# Altium PCB IRF7317+TR.PcbDoc
Units mil, origin at the board's own origin, x right, y up, seen from the top; angles counter-clockwise.
Board outline 2850 x 1640 mil, 2 copper layers (Top Layer, Bottom Layer); 41 components, 22 nets, 105 pads, 34 vias.
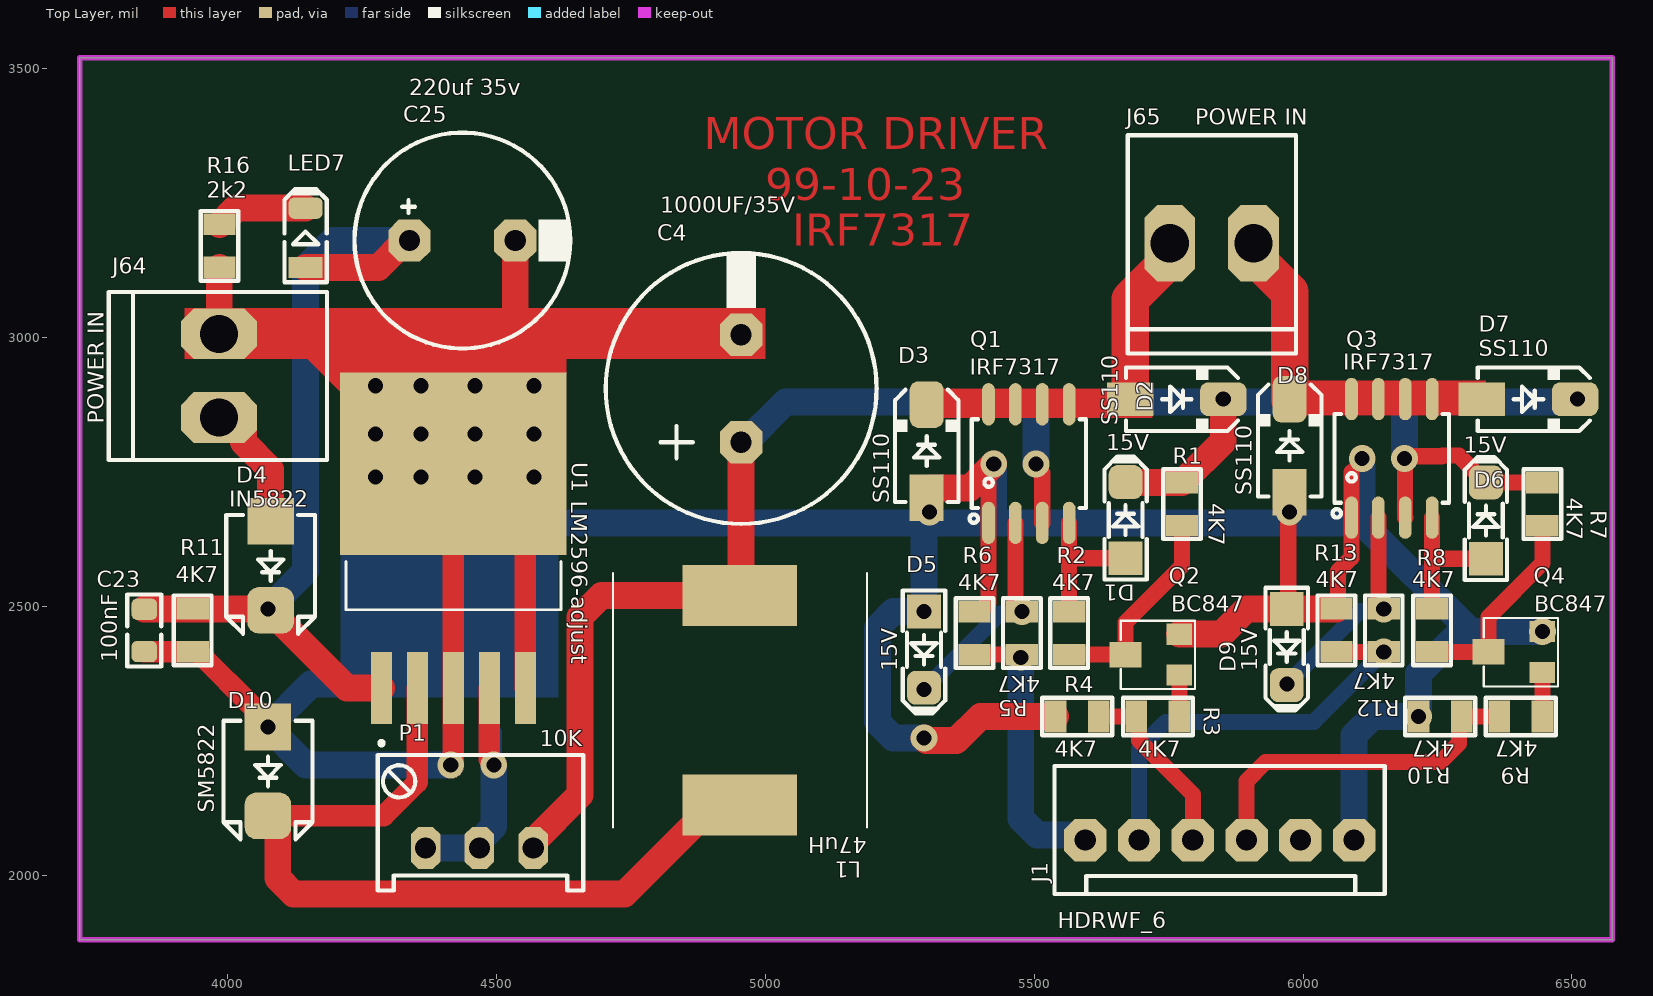
[diagram p0: Top Layer view]
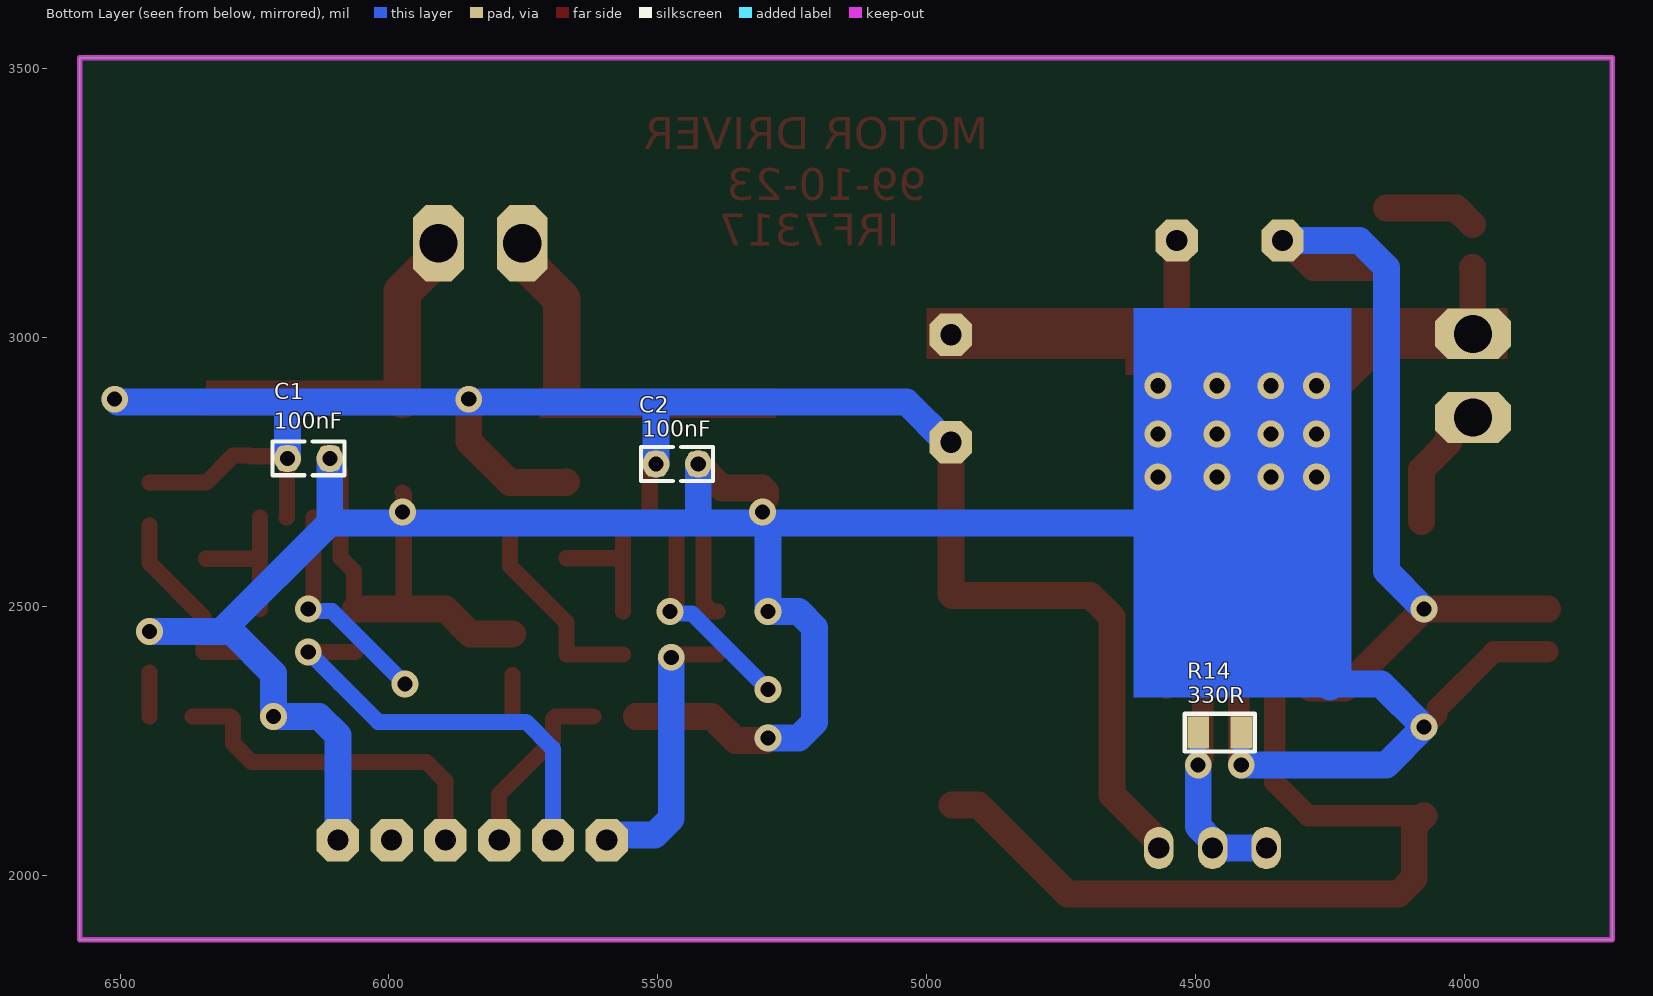
[diagram p1: Bottom Layer view, seen from below]
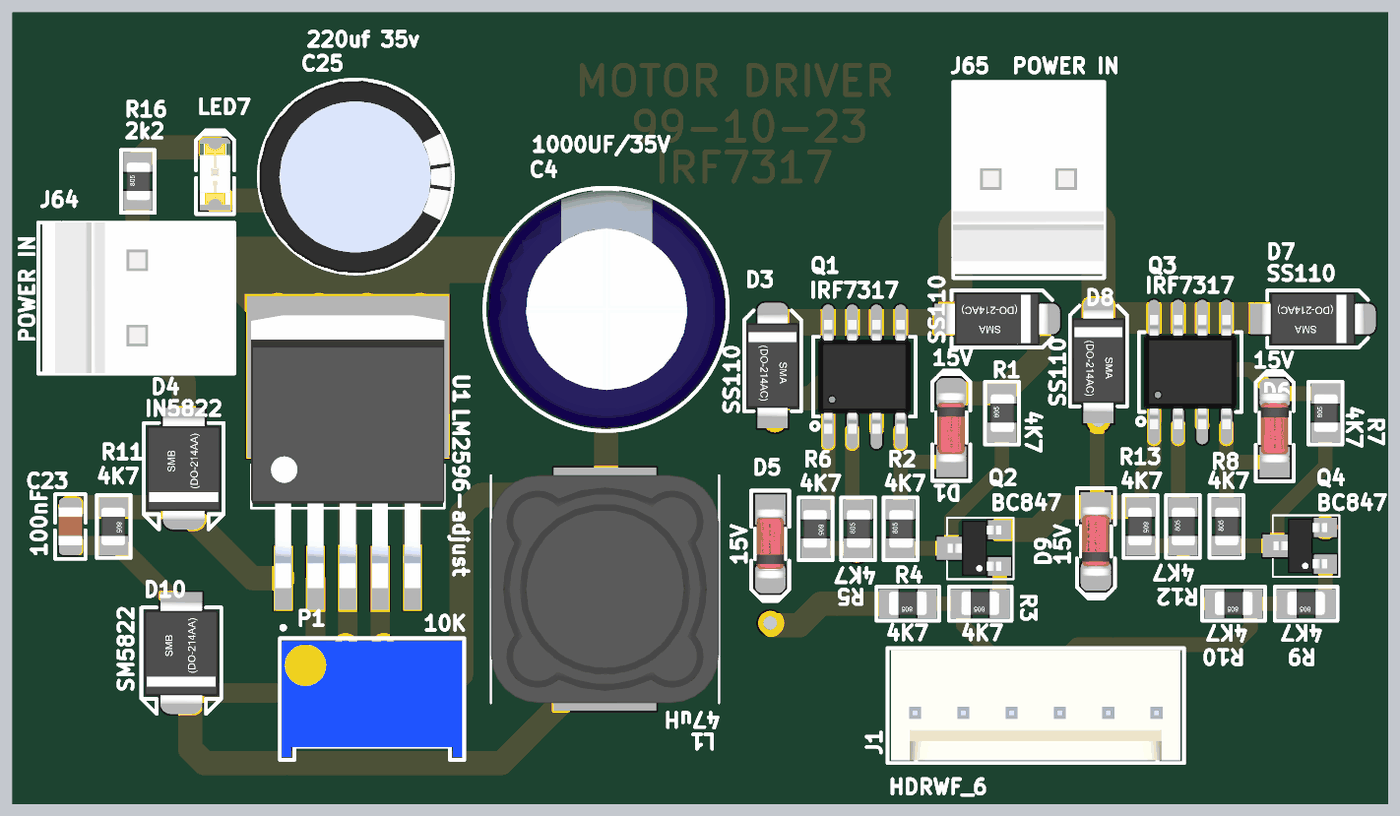
[diagram p2: 3D render of the assembled board from above, using the file's embedded part models]
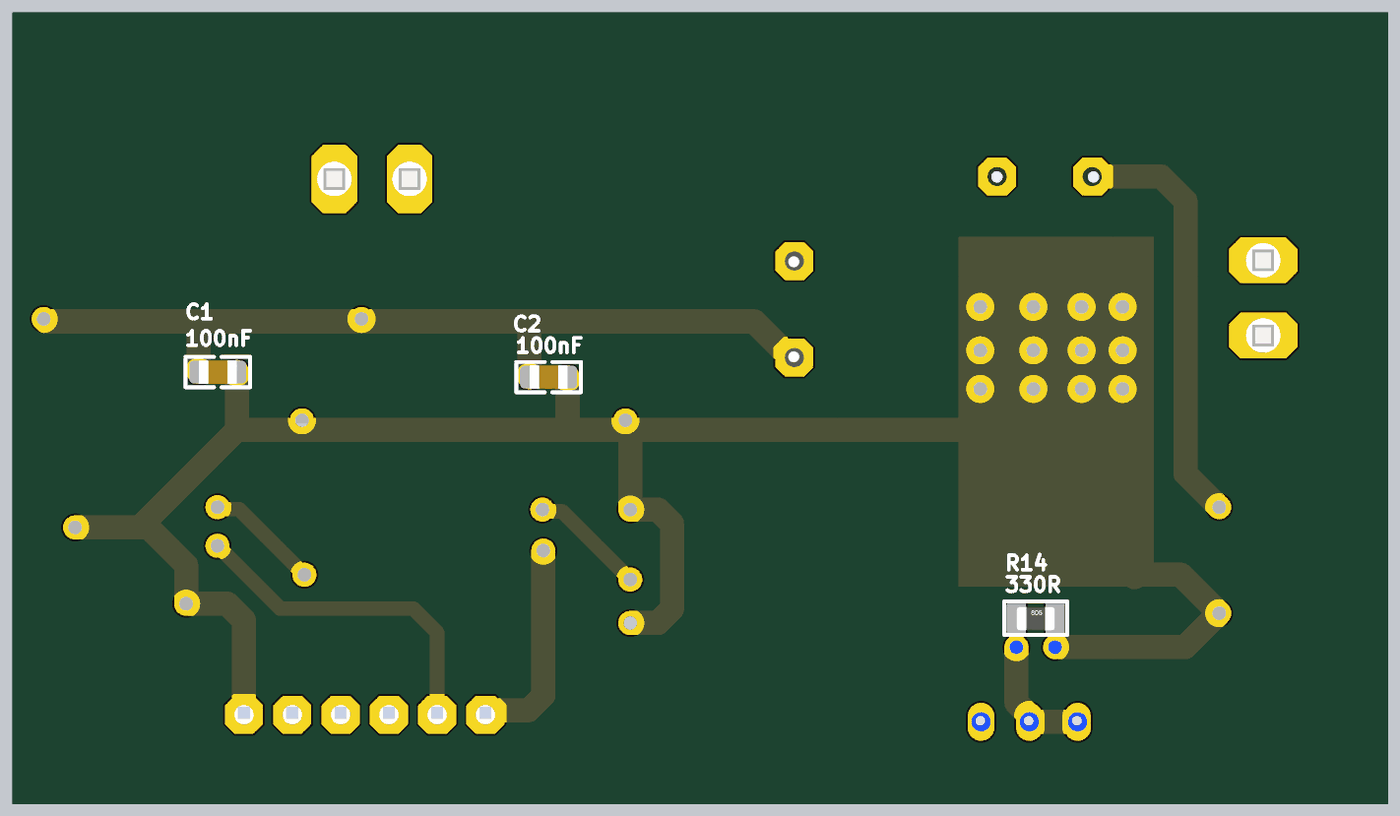
[diagram p3: 3D render of the assembled board from below, using the file's embedded part models]

## Layer stack, top to bottom
Top Solder: solder mask 0.4, Solder Resist, Dk 3.5
Top Layer: signal copper 1.4
Dielectric 1: dielectric 12.6, FR-4, Dk 4.8
Bottom Layer: signal copper 1.4
Bottom Solder: solder mask 0.4, Solder Resist, Dk 3.5

## Board outline
3725,1880 3725,3520 6575,3520 6575,1880

## Design rules (kind name [scope] priority, off if disabled: settings)
Clearance [All] p1: gap=10 ignorepadtopadclearanceinfootprint=FALSE except(0: Arc-Hole Track-Hole SMDPad-Hole THPad-Hole Via-Hole Fill-Hole Poly-Hole Region-Hole Text-Hole)
PolygonConnect [All] p1: connectstyle=Relief reliefconductorwidth=10 reliefentries=4 polygonreliefangle="90 Angle" airgapwidth=10
RoutingVias [All] p1: holewidth=28 width=50 viastyle="Through Hole" minholewidth=28 minwidth=50 maxholewidth=28 maxwidth=50
SolderMaskExpansion [All] p1: expansion=4 istentingtop=FALSE
Width [All] p1: maxlimit=70 minlimit=20 preferedwidth=30 minimp=50.000000 maximp=50.000000 favimp=50.000000
30 further rules are at their usual default settings.

## Components (designator, comment, footprint, x,y, rotation, side; value= is the part's Value field where it differs from the comment)
C1 "100nF" C0805 6149.37,2775 r0 bottom
C2 "100nF" C0805 5464.18,2764.44 r0 bottom
C4 "1000UF/35V" C_EL_12X25 4955,2905 r90 top
C23 "100nF" C0805 3845,2455 r90 top
C25 "220uf 35v" C_EL_10X12 4436.57,3180 r0 top
D1 "15V" D_SOD80 5670,2660 r90 top
D2 "SS110" D_SMA 5765,2885 r0 top value=?
D3 "SS110" D_SMA 5300,2788.39 r90 top value=?
D4 "IN5822" D_SMB 4080,2575 r270 top
D5 "15V" D_SOD80 5295,2419.13 r270 top
D6 "15V" D_SOD80 6340,2659.15 r90 top
D7 "SS110" D_SMA 6419.17,2885 r0 top value=?
D8 "SS110" D_SMA 5975,2798.39 r90 top value=?
D9 "15V" D_SOD80 5969.67,2424.13 r270 top
D10 "SM5822" D_SMB 4075,2192.68 r270 top value=?
J1 "HDRWF_6" WF_6 5845,2065 r0 top
J64 "POWER IN" PWL_2 3983.81,2928.65 r90 top
J65 "POWER IN" PWL_2 5830,3175 r180 top
L1 "47uH" CDRH127LDNP560MC-12*12 4952.69,2130.26 r0 top
LED7 "" LED1206RED 4145,3185.12 r90 top
P1 "10K" POT_3296W 4468.27,2050.27 r0 top
Q1 "IRF7317" SO_8 5490,2765.24 r90 top
Q2 "BC847" SOT23 5770,2372 r90 top
Q3 "IRF7317" SO_8 6165,2775 r90 top
Q4 "BC847" SOT23 6445,2377 r90 top
R1 "4K7" R0805 5775,2690 r0 top
R2 "4K7" R0805 5565,2450 r0 top
R3 "4K7" R0805 5730,2295 r90 top
R4 "4K7" R0805 5580,2295 r90 top
R5 "4K7" R0805 5476.99,2450 r0 top
R6 "4K7" R0805 5388.98,2450 r180 top
R7 "4K7" R0805 6445,2690 r0 top
R8 "4K7" R0805 6240,2455 r0 top
R9 "4K7" R0805 6405,2295 r90 top
R10 "4K7" R0805 6255,2295 r90 top
R11 "4K7" R0805 3935,2455 r180 top
R12 "4K7" R0805 6150,2455 r0 top
R13 "4K7" R0805 6061.99,2455 r180 top
R14 "330R" R0805 4455,2265 r270 bottom
R16 "2k2" R0805 3985,3170 r0 top
U1 "LM2596-adjust" "to-263-5 5d2pak LM2596S" 4420,2765 r90 top

## Footprints (in the part's own frame and the unit in brackets; to place one, negate y for a bottom-side part, rotate by r counter-clockwise, add the part's x,y. Pads: shape width x height; smd on the part's side, far side on the other; paste and mask are expansions set on the pad)
C0805 [mm] "CHIP Capacitor, 2.0X1.3mm, 0805"
  rrect50% 1x1.2 smd mask+0.075: 1(-1,0) 2(1,0)
  Top Layer pour cut-out: -0.5,0.8 0.5,0.8 0.5,-0.8 -0.5,-0.8
  silkscreen extent -1.7,-0.8 1.7,0.8, body extent -1,-0.62 1,0.62, height 1
C_EL_10X12 [mm] "Cap Elec, D10.0X12.0H pitch: 5.0mm"
  oct 2x2 hole 1: 1(-2.5,0) 2(2.5,0)
  silkscreen extent -5.1,-5.1 5.1,5.1, body extent -5.07,-5.08 5.05,5.04, height 13.7
C_EL_12X25 [mm] "Cap Elec, D12.0X25.0H pitch: 5.0mm, RB.2/.5"
  oct 2x2 hole 1: 1(-2.54,0) 2(2.54,0)
  silkscreen extent -6.4,-6.4 6.4,6.4, body extent -6.25,-6.27 6.25,6.21, height 25.8
CDRH127LDNP560MC-12*12 [mm]
  rect 5.4x2.9 smd: 1(0,0) 2(0,9.9)
  silkscreen extent -6,-1.05 6,10.95, body extent -6,-1.05 6,10.95, height 7.8
D_SMA [mm] "SMA Molded Diode, 2-Leads, Body 4.3x2.7mm, SOD-128"
  rect 2.2x1.6 smd: 1(-2.2,0)
  rrect50% 2.2x1.6 smd: 2(2.2,0)
  silkscreen extent -2.4,-1.5 2.9,1.5, body extent -2.75,-1.4 2.75,1.4, height 2.6
D_SMB [mm] "SMB Molded Diode, 2-Leads, Body 4.3x3.5mm"
  rect 2.2x2.2 smd: 1(-2.1,0)
  rrect50% 2.2x2.2 smd: 2(2.1,0)
  Top Layer pour cut-out: -1.524,2.1 -1.524,-2.1 1.524,-2.1 1.524,2.1
  silkscreen extent -2.4,-2.1 3.2,2.1, body extent -2.75,-1.95 2.75,1.95, height 2.45
D_SOD80 [mm] "SOD-80 MINI-MELF 3.6X1.6mm, LL-34, LL4148"
  rect 1.6x1.6 smd: 1(-1.8,0)
  rrect50% 1.6x1.6 smd: 2(1.8,0)
  Top Layer pour cut-out: -1.016,1.016 1.016,1.016 1.016,-1.016 -1.016,-1.016
  silkscreen extent -2.8,-1 3,1, body extent -1.85,-0.8 1.85,0.8, height 2
LED1206RED [mm] "LED, 1206, RED"
  rect 1x1.6 smd mask+0.075: 1(-1.4,0)
  rrect50% 1x1.6 smd mask+0.075: 2(1.4,0)
  Top Layer pour cut-out: -1.1,1.1 -1.1,-1.1 1.1,-1.1 1.1,1.1
  silkscreen extent -2.1,-1 2.3,1, body extent -1.6,-0.8 1.6,0.8, height 0.68
POT_3296W [mm] "POT, TRIM, 10.0X5.0mm, pitch: 2.5mm 3299W 3296W S64W"
  oct 1.4x2 / inner round 1.2 / far side oval 1.4x2 hole 1: 1(-2.54,0) 2(0,0) 3(2.54,0)
  silkscreen extent -4.8,-2 4.9,4.4, body extent -4.73,-1.85 4.8,4.25, height 11.56
PWL_2 [mm] "Connector; Header; 2 Position"
  oct 2.4x3.6 hole 1.8: 1(-1.98,0) 2(1.98,0)
  silkscreen extent -3.98,-5.1 3.96,5.21, body extent -3.96,-5 3.96,5, height 13.5
R0805 [mil]
  rect 60x40 smd: 1(0,40) 2(0,-40)
  silkscreen extent -35,-65 35,65, body extent -24,-39 26,39, height 31
SO_8 [mm] "SOP-8, 5x3.9mm body 1.27mm pitch, SOT96-1, M08A, S8, SOIC8, VO8, MS-012AA(JEDEC), R-8, 8S2, VOG8"
  oval 2x0.6 smd: 1(-2.8,1.905) 2(-2.8,0.635) 3(-2.8,-0.635) 4(-2.8,-1.905) 5(2.8,-1.905) 6(2.8,-0.635) 7(2.8,0.635) 8(2.8,1.905)
  silkscreen extent -2.8,-2.7 2.1,2.8, body extent -3,-2.45 3,2.45, height 1.7
SOT23 [mm]
  rect 1x1.2 smd: 1(0,0) 2(1.93,0)
  rect 1.2x1.5 smd: 3(0.965,2.54)
  silkscreen extent -0.66,-0.74 2.57,2.77, body extent -0.48,-0.08 2.42,2.72
"to-263-5 5d2pak LM2596S" [mm]
  rect 3.4x1 smd paste-3 mask+0: 1(-10.6,3.4) 2(-10.6,1.7) 3(-10.6,0) 4(-10.6,-1.7) 5(-10.6,-3.4)
  rect 8.6x10.7 smd paste-6 mask+0: 6(0,0)
  silkscreen extent -13.3,-5.08 -4.62,5.08, body extent -11.11,-5.08 3.24,5.08, height 4.65
WF_6 [mm] "DS1070  WF, Cvilux CI31 pitch 2.54mm"
  oct 2x2 hole 1: 1(-6.35,0) 2(-3.81,0) 3(-1.27,0) 4(1.27,0) 5(3.81,0) 6(6.35,0)
  silkscreen extent -7.8,-2.55 7.8,3.5, body extent -7.62,-2.4 7.62,3.4, height 11.56

## Part data
C1 C2 C23: library part C
C4: library part CAP_ELECTRO_POLIMER
C25: library part CAP3528
D1 D5 D6 D9: library part ZENER, "DIODE, ZENER, 3W, 5.6V", ASSEMBLY=ASSEMBLY, DESC=DESCRIPTION, MANF=MCC, MANF_P#=3SMAJ5919B-TP, PARAM=5.6V, PARAM2="0.5W, 2Ohm, 67mA, -55~150oC", Price=0.5$
D2 D3 D7 D8 D10: library part SCHOTTKY, "DIODE, SCHOTTKY, 40V, 1A", ASSEMBLY=ASSEMBLY, DESC=DESCRIPTION, MANF=DIODES, MANF_P#=1N5819HW-7-F, PARAM=40V, PARAM2=1A, Price=PRICE
D4: library part "Diode 1N4005", "1 Amp General Purpose Rectifier", Code_JEDEC=DO-204-AL, ComponentLink1Description="Manufacturer Link", ComponentLink1URL=http://www.fairchildsemi.com/, ComponentLink2Description=Datasheet, ComponentLink2URL=http://www.fairchildsemi.com/ds/1N%2F1N4001.pdf, DatasheetVersion=1998, LatestRevisionDate=17-Jul-2002, LatestRevisionNote="Re-released for DXP Platform.", PackageDescription="Diode, Axial; Body 5.2 x 2.7 mm (LxDia. max), Lead Dia. 0.86 mm (max)", PackageReference=DO-41, PackageVersion=Aug-1999, Published=8-Jun-2000, Publisher="Altium Limited"
J1: "Header, WF, Pitch: 2.54mm"
J64 J65: library part "sip 2", "WR-PHD Pin Header, THT, pitch 2.54mm, Single Row, Vertical, 2pin", Contact Resistance=20mOhm, Operating Temperature="-40 to +105degC", Part Number=61300211121, Rated Current=3A, Withstanding Voltage=500VAC, Working Voltage=250VAC, ComponentLink1Description=Manufacturer, ComponentLink1URL=http://www.we-online.de, ComponentLink2Description=Datasheet, ComponentLink2URL=https://katalog.we-online.de/em/datasheet/6130xx11121.pdf, Gender=Male, Mounting Technology=THT, Orientation=Vertical, Packaging=Bag, Pin Number=2, Pitch=2.54mm, Published Date="June 2019", Publisher="Wurth Elektronik", Row Number=Single
L1: library part CDRH127_LDNP-560MC, "Inductor", Arrow Part Number=CDRH127/LDNP-560MC, Manufacturer_Name=Sumida, Mouser Part Number=851-CDRH127LDNP560MC, Arrow Price/Stock=https://www.arrow.com/en/products/cdrh127ldnp-560mc/sumida, Datasheet Link=https://www.arrow.com/en/products/cdrh127ldnp-560mc/sumida, Height=8mm, Manufacturer_Part_Number=CDRH127/LDNP-560MC, Mouser Price/Stock=https://www.mouser.co.uk/ProductDetail/Sumida/CDRH127-LDNP-560MC?qs=IXCoV6m%252B579ap3iATSRauQ%3D%3D
LED7: library part LED3mm
P1: library part Multi-Turn, "Potentiometer"
Q1 Q3: library part IRF7317PBF, "Transistor", Manufacturer_Name=Infineon, Mouser Part Number=942-IRF7317PBF, Arrow Part Number=IRF7317PBF, Arrow Price/Stock=https://www.arrow.com/en/products/irf7317pbf/infineon-technologies-ag, Datasheet Link=http://www.infineon.com/dgdl/irf7317pbf.pdf?fileId=5546d462533600a4015355f5b8de1b3d, Height=1.75mm, Manufacturer_Part_Number=IRF7317PBF, Mouser Price/Stock=https://www.mouser.com/Search/Refine.aspx?Keyword=942-IRF7317PBF
Q2 Q4: library part BC847AMTF, "Transistor BJT NPN", Manufacturer_Name="ON Semiconductor", Mouser Part Number=512-BC847AMTF, Arrow Part Number=BC847AMTF, Arrow Price/Stock=https://www.arrow.com/en/products/bc847amtf/on-semiconductor, Datasheet Link=http://www.onsemi.com/pub/Collateral/BC846-D.PDF, Height=1.2mm, Manufacturer_Part_Number=BC847AMTF, Mouser Price/Stock=https://www.mouser.com/Search/Refine.aspx?Keyword=512-BC847AMTF
R1 R2 R3 R4 R5 R6 R7 R8 R9 R10 R11 R12 R13 R16: library part R
R14: library part Res1, "Resistor", LatestRevisionDate=17-Jul-2002, LatestRevisionNote="Re-released for DXP Platform.", PackageDescription="Axial Device, Thru-Hole; 2 Leads; 0.3 in Pin Spacing", PackageReference=AXIAL-0.3, Published=8-Jun-2000, Publisher="Altium Limited"
U1: library part LM2596s

## Via types
v1: diameter 50, hole 28, Top Layer to Bottom Layer, 34 vias

## Nets (pads, with @x,y where several pads share a name; then routed paths per layer and width w, separated by ;. In a path a pad name is that pad's centre, name@x,y a point inside that pad or via, vN(x,y) a via of type N, cw(c..) or ccw(c..) an arc to the next point about the centre after c; other vN are vias at no path point)
24V: C23.2 C25.1 D4.2 LED7.1 R11.2 U1.1 | length 1593.9
  Top Layer w50: C23.2@3845,2495 R11.2 v1(4075,2495) 4222.32,2347.68 U1.1 ; LED7.1 4280.37,3130 4330.37,3180 C25.1
  Bottom Layer w50: v1(4075,2495) 4145,2565 4145,3130 4195,3180 C25.1
+19R: D4.1 J64.1 | length 246.7
  Top Layer w50: J64.1 4007.43,2850.7 4029.68,2828.45 4029.68,2804.83 4080,2754.51 D4.1
GND: C1.1 C2.1 C4.2 C23.1 C25.2 D3.1 D5.1 D8.1 D9.1 D10.1 J1.6 J64.2 Q1.1 Q2.2 Q3.1 Q4.2 R4.1 R6.2 R10.1 R11.1 R13.2 R14.1 R16.2 U1.3 U1.5 U1.6 | length 7948.9
  Top Layer w30: v1(4415,2205) v1@4417.5,2207.5 ; R6.2 5398.98,2490 5415,2506.02 Q1.1 5415,2749.22 5424.81,2759.03 v1(5424.81,2764.44) ; D9.1 5972.34,2497.66 5972.34,2709.11 D8.1 ; R13.2 6065,2498.01 6065,2565 6090,2590 Q3.1 6090,2749.59
  Top Layer w40: C23.1 3924.37,2415.63 3925,2415 R11.1 3945,2415 4051.69,2308.31 4051.69,2298.66 v1(4075,2275.35) ; v1(4415,2205) 4415,2207.71 4420,2212.71 U1.3 U1.6 4553.86,2631.14 U1.5
  Top Layer w50: J64.2 4137.06,3006.6 4378.66,2765 U1.6 4535,2880 C25.2 ; J64.2@3983.81,3026.6 J64.2@3984.4,3027.2 ; J64.2@3984.4,3007.2 3984.4,3129.4 R16.2 ; v1(5295,2255) 5300,2250 5355,2250 5400,2295 R4.1 ; D3.1 5300,2713.58 5306.5,2720.08 5380.45,2720.08 v1(5424.81,2764.44) ; Q2.2 5848,2448 5895,2495 D9.1 R13.2
  Bottom Layer w30: v1(4415,2205) R14.1
  Bottom Layer w50: 4250,2350 4245,2355 4154.65,2355 v1(4075,2275.35) 4145.35,2205 v1(4415,2205) ; 4500,2665 4510,2655 v1@5295,2655 ; v1(5295,2255) 5237.9,2255 5208.61,2284.29 5208.61,2460.71 5237.9,2490 v1(5295,2490) v1@5295,2655 ; v1(5424.81,2764.44) 5424.81,2655.19 5425,2655 ; J1.6 6095,2260 6130,2295 v1(6215,2295) 6215,2375 6293,2453 6312,2453 ; v1(6110,2775) 6110,2655 ; v1(6445,2453) 6312,2453 ; v1@5295,2655 5425,2655 ; 5425,2655 6110,2655 ; 6110,2655 6312,2453
  other v1: 5305,2675 5975,2675 4275,2740 4360,2740 4460,2740 4570,2740 4275,2820 4360,2820 4460,2820 4570,2820 4275,2910 4360,2910 4460,2910 4570,2910
Motor-A: D7.1 D8.2 J65.1 Q3.5 Q3.6 Q3.7 Q3.8 | length 317.8
  Top Layer w70: J65.1 5907.95,3151.38 5975,3084.33 D8.2
Motor-B: D2.1 D3.2 J65.2 Q1.5 Q1.6 Q1.7 Q1.8 | length 325.3
  Top Layer w70: D2.1@5683.19,2885 D2.1 5678.39,3071.09 5752.05,3144.75 J65.2
Motor-Direct1: J1.1 R5.2 R6.1 | length 522.6
  Top Layer w30: R6.1 R5.2@5475,2410
  Bottom Layer w50: v1(5475,2405) 5475,2105 5505.67,2074.33 5585.67,2074.33 J1.1
Motor-Direct2: J1.2 R12.2 R13.1 | length 787.6
  Top Layer w30: R13.1 v1(6150,2415)
  Bottom Layer w30: J1.2 5695,2235 5745,2285 6020,2285 6090.59,2355.59 v1(6150,2415)
NetD1_1: D1.1 Q1.4 R2.1 | length 274.5
  Top Layer w30: R2.1 5565,2600 ; Q1.4 5565,2600 ; D1.1 5575.87,2589.13 5565,2600
NetD5_2: D5.2 Q1.2 R5.1 | length 419.4
  Top Layer w30: v1(5295,2345) D5.2 ; Q1.2 5465,2495 5470,2490 v1(5476.99,2490)
  Bottom Layer w30: v1(5295,2345) 5436.17,2486.17 5473.16,2486.17 v1(5476.99,2490)
NetD6_1: D6.1 Q3.4 R8.1 | length 272.5
  Top Layer w30: R8.1 6240,2595 ; Q3.4 6240,2595 ; D6.1 6246.71,2588.29 6240,2595
NetD9_2: D9.2 Q3.2 R12.1 | length 412.3
  Top Layer w30: D9.2 5969.67,2354.67 v1(5970,2355) ; Q3.2 6140,2519.14 ccw(c6174.14,2519.14) v1(6150,2495)
  Bottom Layer w30: v1(5970,2355) 6106.17,2491.17 6146.17,2491.17 v1(6150,2495)
NetD10_2: D10.2 L1.1 U1.2 | length 1542.1
  Top Layer w40: D10.2 4093.31,2110 4290,2110 4353.07,2173.07 U1.2
  Top Layer w50: D10.2 4093.31,2091.69 4093.31,1994.29 4122.6,1965 4738.22,1965 4903.47,2130.26 L1.1
NetLED7_2: LED7.2 R16.1 | length 172.5
  Top Layer w50: R16.1 4015.24,3240.24 LED7.2
NetP1_1: P1.1 P1.2 R14.2 U1.4 | length 471.8
  Top Layer w40: U1.4 4486.93,2215.78 4495,2207.71 v1(4495,2205)
  Bottom Layer w30: v1(4495,2205) R14.2
  Bottom Layer w50: P1.1 P1.2 4468.27,2063.46 4495,2090.19 v1(4495,2205)
NetQ2_1: Q2.1 R3.2 | length 77
  Top Layer w30: R3.2 Q2.1
NetQ2_3: Q2.3 R1.2 R2.2 | length 388.5
  Top Layer w30: R2.2 Q2.3 5670,2470 5775,2575 R1.2
NetQ4_1: Q4.1 R9.2 | length 82
  Top Layer w30: R9.2 Q4.1
NetQ4_3: Q4.3 R7.2 R8.2 | length 381.4
  Top Layer w30: R8.2 Q4.3 6345,2480 6445,2580 R7.2
PWMA: J1.4 R9.1 R10.2 | length 656.1
  Top Layer w30: J1.4 5895,2175 5930,2210 6255,2210 6290,2245 6290,2290 R10.2 R9.1
PWMB: J1.3 R3.1 R4.2 | length 343.5
  Top Layer w30: R4.2 R3.1 5695,2290 5695,2250 5795,2150 J1.3
Vadj: C1.2 C2.2 C4.1 D1.2 D2.2 D6.2 D7.2 L1.2 P1.3 Q1.3 Q3.3 R1.1 R7.1 | length 3674.9
  Top Layer w30: v1(5503.55,2764.44) 5503.55,2759.03 5515,2747.58 Q1.3 ; Q3.3 6189.37,2665.39 6189.37,2774.37 v1(6188.74,2775) 6192.57,2778.83 6257.98,2778.83 6259.15,2780 6290.02,2780 D6.2 R7.1
  Top Layer w50: P1.3 4568.27,2062.08 4655,2148.81 4655,2480 4695.02,2520.02 L1.2 4955,2522.33 C4.1 ; D1.2 5670.43,2730.43 5774.57,2730.43 R1.1 5851.61,2806.61 v1(5851.61,2885)
  Bottom Layer w50: C4.1 4962.78,2805 5037.78,2880 5510,2880 ; v1(5503.55,2764.44) 5503.55,2873.55 5510,2880 ; v1(6188.74,2775) 6188.74,2876.26 6185,2880 ; v1(6510,2885) 6505,2880 6185,2880 ; 5510,2880 6185,2880
VCC: J1.5

## Keep-outs
Keep-Out Layer:
  the board outline again, w10

## Other copper
Top Layer:
  rectangle net Motor-B: 5280,2850 5720,2905
  rectangle net Motor-A: 5960,2855 6340,2920
  rectangle net GND: 4210,2930 4630,2970
  rectangle net GND: 3920,2960 5000,3055
  text "MOTOR DRIVER" at 4885,3350.01 h60
  text "99-10-23" at 5000,3255.01 h60
  text "IRF7317" at 5050,3170 h60
Bottom Layer:
  rectangle net GND: 4210,2330 4615,3055